# Altium PCB NASA.PcbDoc
Units mm, origin at the board's own origin, x right, y up, seen from the top; angles counter-clockwise.
Board outline 44.73 x 40.7 mm, 2 copper layers (Top Layer, Bottom Layer); 26 components, 16 nets, 123 pads, 54 vias.
Unrouted connection lines stored in the file: 2.
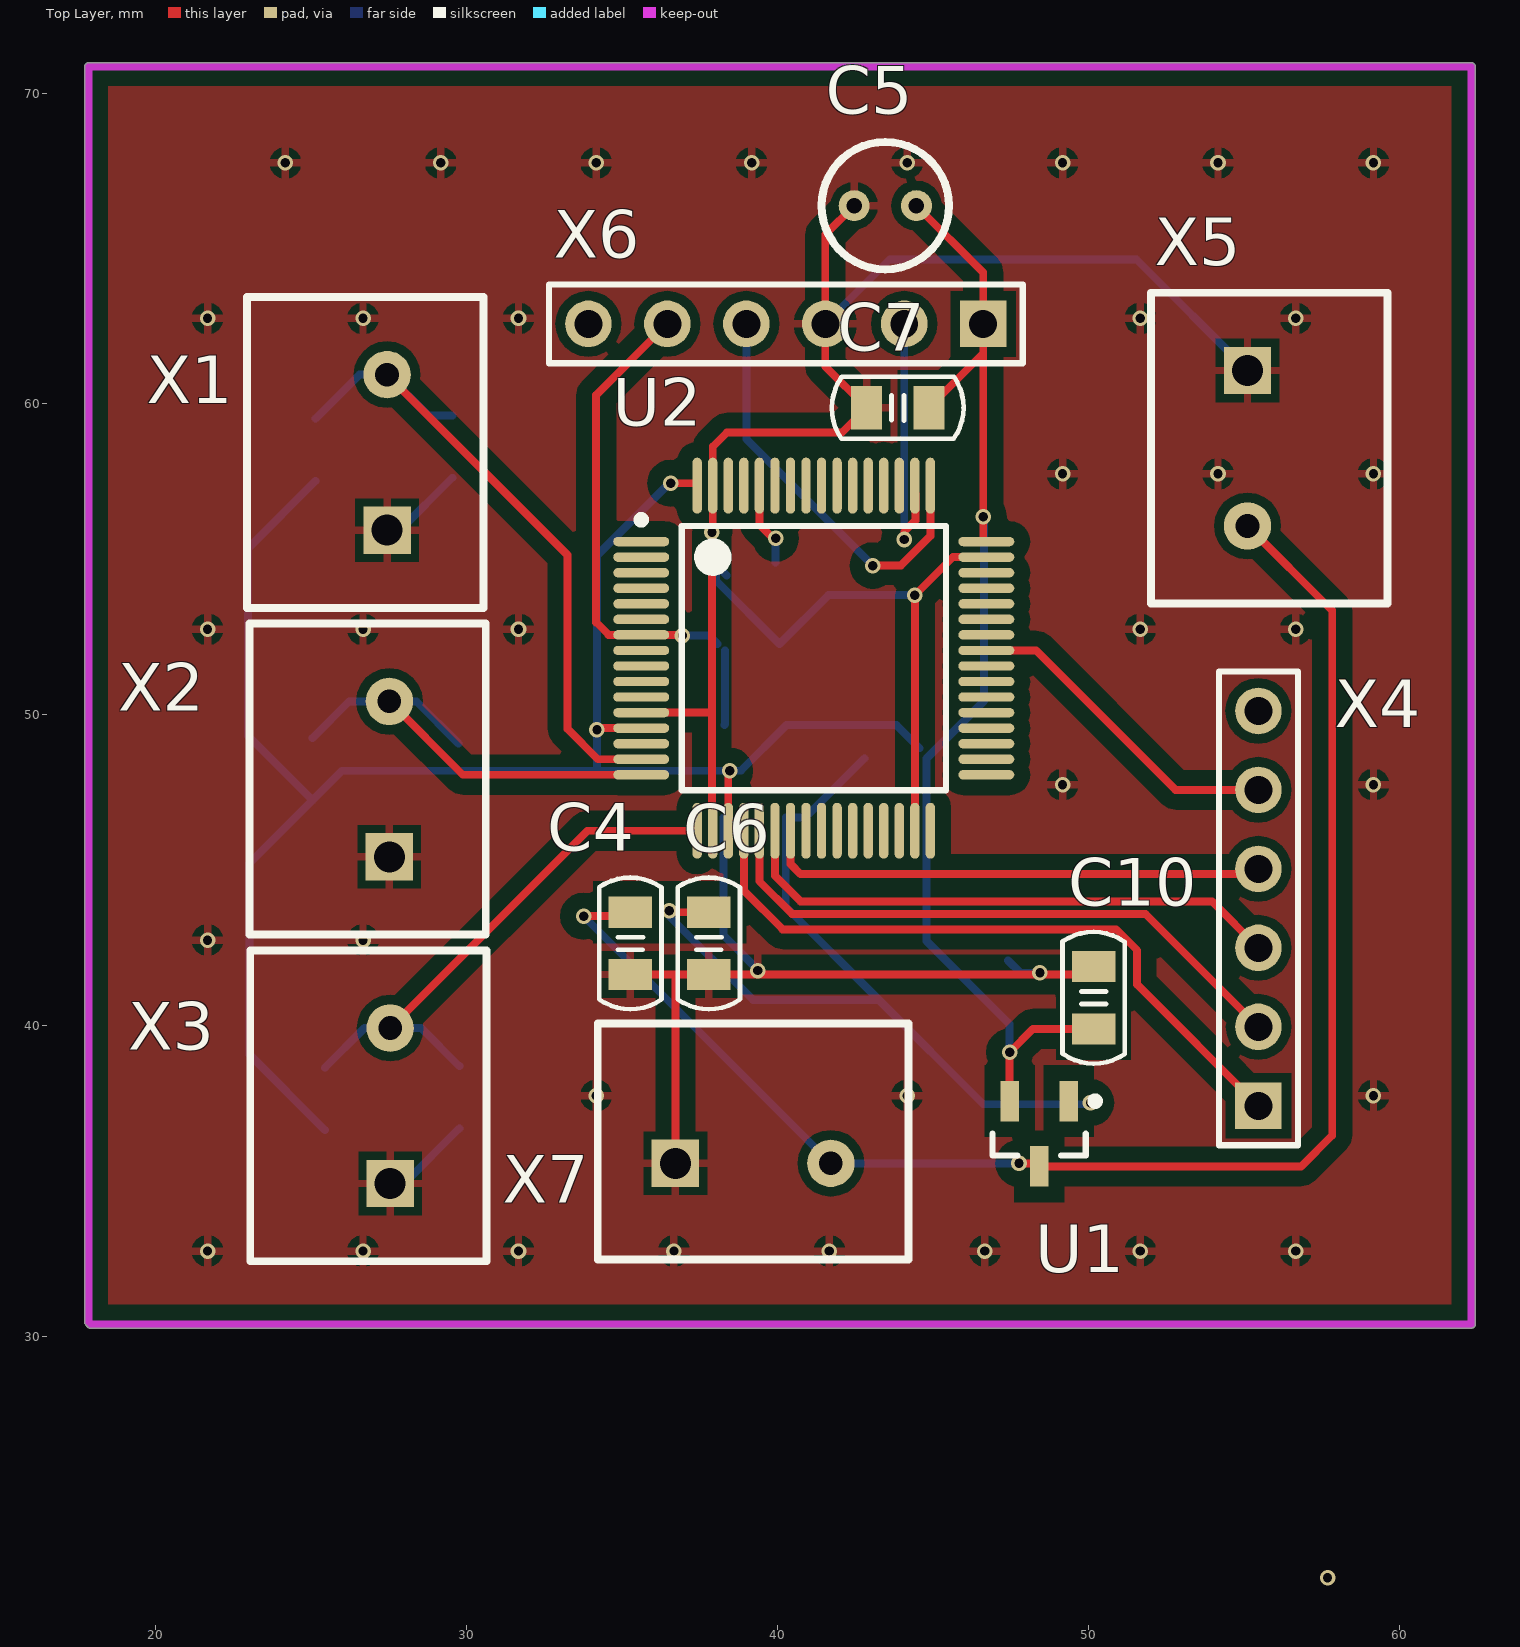
[diagram p0: Top Layer view]
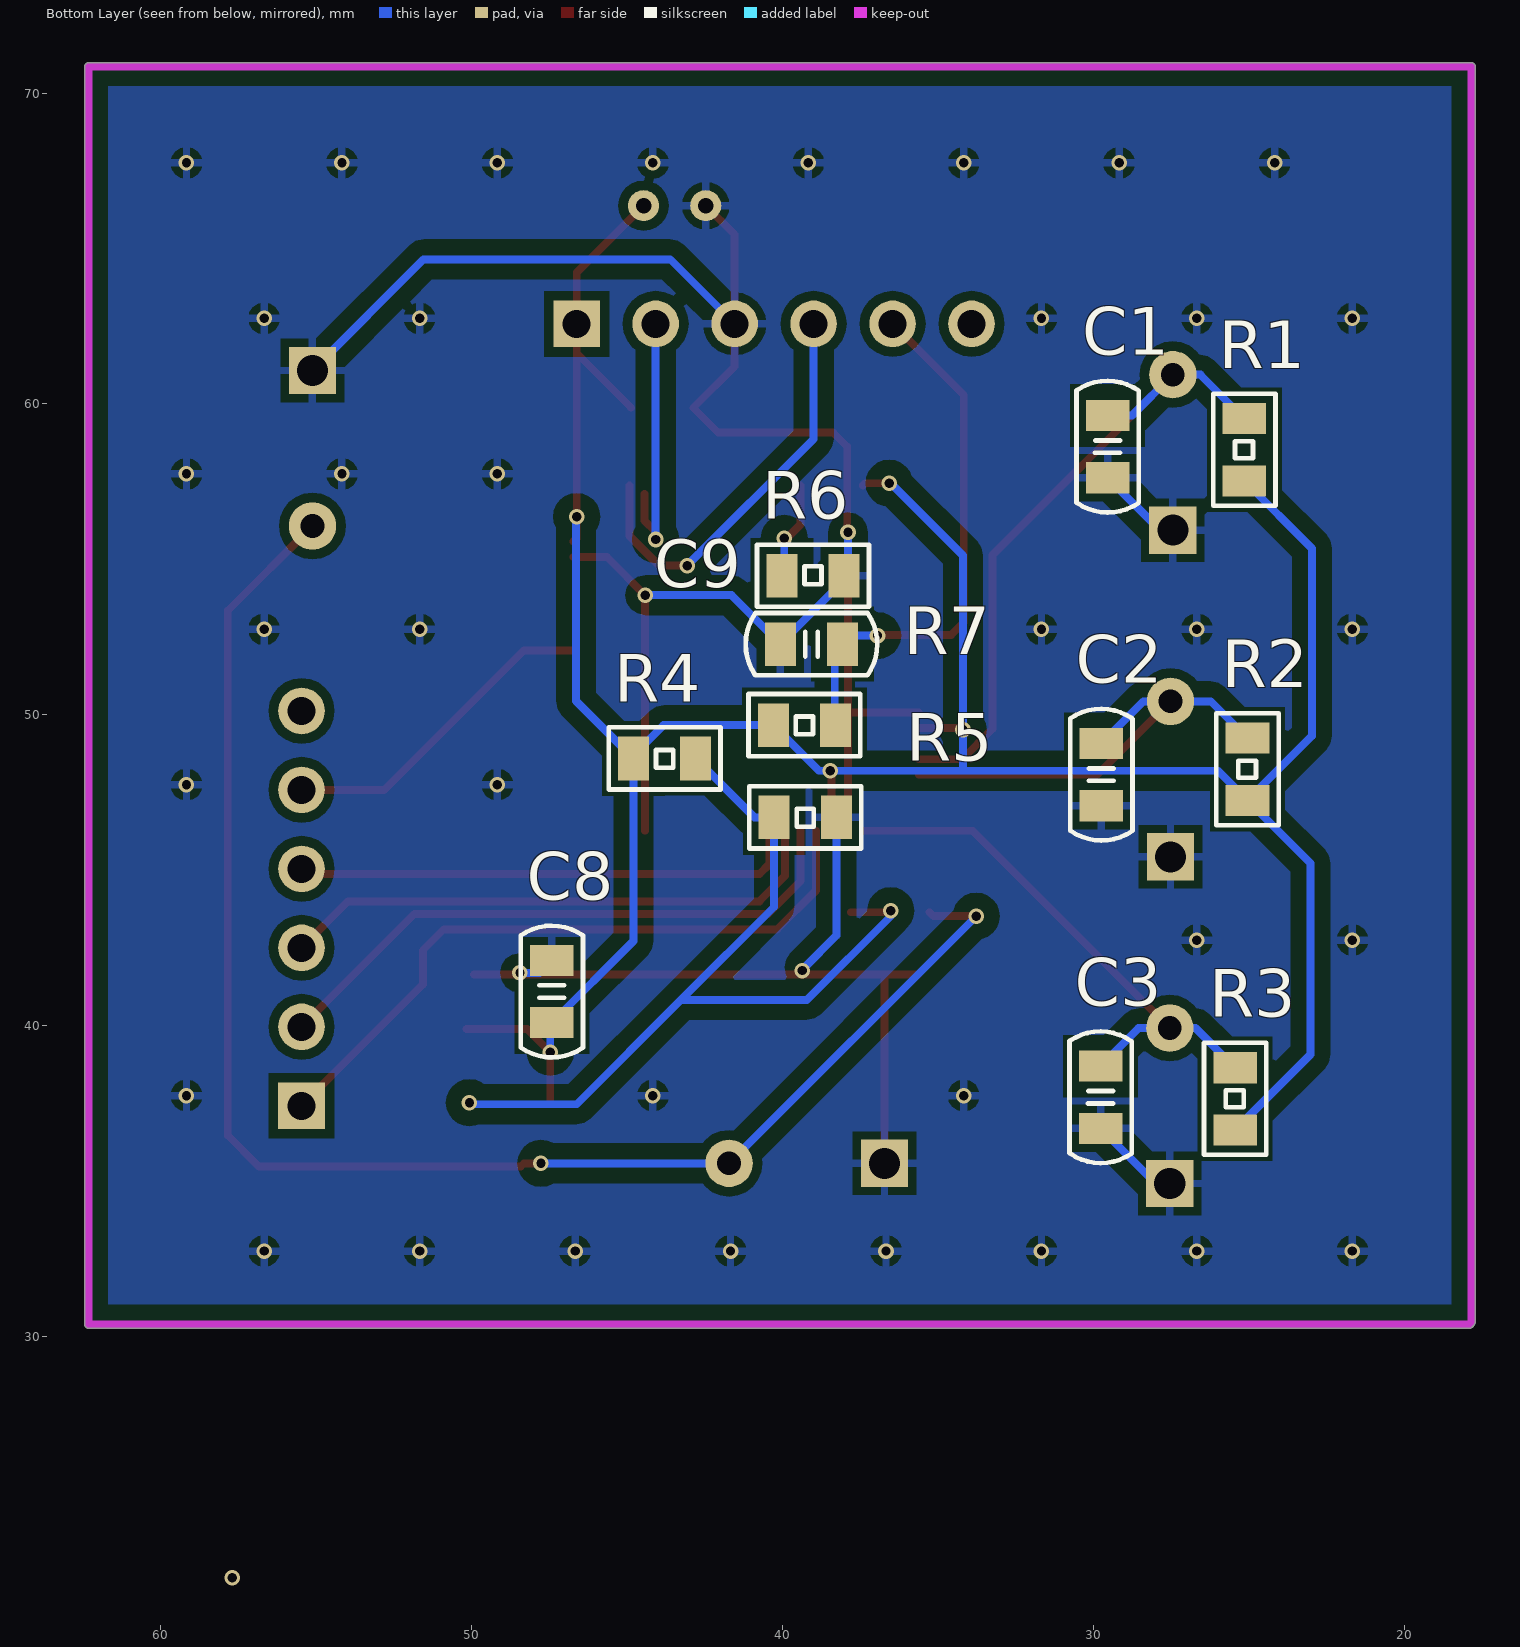
[diagram p1: Bottom Layer view, seen from below]

## Layer stack, top to bottom
Top Solder: solder mask 0.0102, Solder Resist, Dk 3.5
Top Layer: signal copper 0.0356
Dielectric 1: dielectric 0.32, FR-4, Dk 4.8
Bottom Layer: signal copper 0.0356
Bottom Solder: solder mask 0.0102, Solder Resist, Dk 3.5

## Board outline
17.776,30.371 cw(c17.85,30.475) 17.723,30.475 17.723,70.85 cw(c17.85,70.85) 17.85,70.977 62.325,70.977 cw(c62.325,70.85) 62.452,70.85 62.452,30.4 cw(c62.325,30.4) 62.325,30.273 17.9,30.273 cw(c17.9,30.4)

## Design rules (kind name [scope] priority, off if disabled: settings)
Clearance Clearance_1 [InNamedPolygon('K_L01_P002')] p1: gap=0.254
Clearance [All] p2: gap=0.5 except(0.1: Arc-Arc Arc-Track Arc-SMDPad Arc-THPad Arc-Fill Track-Track Track-SMDPad Track-THPad Track-Via Track-Fill SMDPad-SMDPad SMDPad-THPad SMDPad-Via SMDPad-Fill THPad-THPad THPad-Via THPad-Fill Via-Via Via-Fill Fill-Fill Fill-Poly Poly-Poly; 0.3: THPad-Poly)
PolygonConnect [All] p1: connectstyle=Relief reliefconductorwidth=0.254 reliefentries=4 polygonreliefangle="90 Angle" airgapwidth=0.254
RoutingVias [All] p1: holewidth=0.711 width=1.27 viastyle="Through Hole" minholewidth=0.711 minwidth=1.27 maxholewidth=0.711 maxwidth=1.27
SolderMaskExpansion [All] p1: expansion=0.102
Width [All] p1: maxlimit=2 minlimit=0.254 preferedwidth=0.254 minimp=50.000000 maximp=50.000000 favimp=50.000000
30 further rules are at their usual default settings.

## Components (designator, comment, footprint, x,y, rotation, side; value= is the part's Value field where it differs from the comment)
C1 "0.1 uF" "CAPACITOR 0805" 29.55,59.625 r270 bottom
C2 "0.1 uF" "CAPACITOR 0805" 29.75,49.075 r270 bottom
C3 "0.1 uF" "CAPACITOR 0805" 29.775,38.7 r270 bottom
C4 "10 uF" "CAPACITOR 0805" 35.275,41.649 r90 top
C5 "100 uF" D4.15 43.475,66.377 r180 top
C6 "10 nF" "CAPACITOR 0805" 37.8,41.649 r90 top
C7 "10 nF" "CAPACITOR 0805" 42.875,59.876 r0 top
C8 "22 uF" "CAPACITOR 0805" 47.425,42.1 r270 bottom
C9 "0.1 uF" "CAPACITOR 0805" 40.075,52.275 r180 bottom
C10 "0,1 uF" "CAPACITOR 0805" 50.175,39.9 r90 top
R1 "1 k" "Resistor 0805" 25.15,57.525 r90 bottom
R2 "1 k" "Resistor 0805" 25.05,47.25 r90 bottom
R3 "1 k" "Resistor 0805" 25.45,36.65 r90 bottom
R4 "442Om" "Resistor 0805" 42.8,48.596 r0 bottom
R5 "10K" "Resistor 0805" 38.275,46.7 r0 bottom
R6 "100 K" "Resistor 0805" 40.025,54.475 r180 bottom
R7 "10 K" "Resistor 0805" 38.3,49.671 r0 bottom
U1 "LM1117DTX-1.8" MF03A_N 48.425,36.525 r270 top
U2 "STM32L100R8T6" STM-LQFP64_N 41.175,51.822 r0 top
X1 "" DG301-5.0-02P 30.55,53.442 r90 top
X2 "" DG301-5.0-02P 30.625,42.933 r90 top
X3 "" DG301-5.0-02P 30.65,32.425 r90 top
X4 "" PLS-6-3D 55.475,37.425 r90 top
X5 "" DG301-5.0-02P 52.025,63.575 r270 top
X6 "ZL201-06G" PLS-6-3D 46.625,62.575 r180 top
X7 "DG301-5.0-03P" DG301-5.0-02P 34.225,32.475 r0 top

## Footprints (in the part's own frame and the unit in brackets; to place one, negate y for a bottom-side part, rotate by r counter-clockwise, add the part's x,y. Pads: shape width x height; smd on the part's side, far side on the other; paste and mask are expansions set on the pad)
"CAPACITOR 0805" [mm]
  rect 1x1.4 smd: 1(0,0) 2(2,0)
  silkscreen extent -1.12,-1 3.12,1, body extent 0.01,-0.6 2.01,0.6, height 1.26
D4.15 [mm]
  round 1 hole 0.5: 1(-1,0) 2(1,0)
  silkscreen extent -2.05,-2.05 2.05,2.05
DG301-5.0-02P [mm]
  rect 1.524x1.524 hole 1: 1(2.5,3.1)
  round 1.524 hole 0.762: 2(7.5,3.1)
  silkscreen extent 0,0 10,7.6
MF03A_N [mm] "SOT23, 3-Leads, Body 2.9x1.3mm, Pitch 0.95mm, Lead Span 2.4mm, IPC Medium Density"
  rect 1.3x0.6 smd: 1(-1.05,0.95) 2(-1.05,-0.95) 3(1.05,0)
  silkscreen extent -1.17,-1.5 0.7,1.93, body extent -0.7,-1.52 0.7,1.52, height 1.12
PLS-6-3D [mm] "Connector; Header; 6 Position"
  rect 1.5x1.5 hole 0.9: 1(0,0)
  round 1.5 hole 0.9: 2(2.54,0) 3(5.08,0) 4(7.62,0) 5(10.16,0) 6(12.7,0)
  silkscreen extent -1.27,-1.27 13.97,1.27, body extent -1.27,-1.27 13.97,1.27, height 8.44
"Resistor 0805" [mm]
  rect 1x1.4 smd: 1(0,0) 2(2,0)
  silkscreen extent -0.8,-1 2.8,1, body extent -0.03,-0.65 2.02,0.65, height 0.41
STM-LQFP64_N [mm] "Thin QFP, 64-Leads, Body 10x10mm, Pitch 0.5mm, IPC Medium Density"
  oval 1.8x0.3 smd: 1(-5.55,3.75) 2(-5.55,3.25) 3(-5.55,2.75) 4(-5.55,2.25) 5(-5.55,1.75) 6(-5.55,1.25) 7(-5.55,0.75) 8(-5.55,0.25) 9(-5.55,-0.25) 10(-5.55,-0.75) 11(-5.55,-1.25) 12(-5.55,-1.75) 13(-5.55,-2.25) 14(-5.55,-2.75) 15(-5.55,-3.25) 16(-5.55,-3.75) 33(5.55,-3.75) 34(5.55,-3.25) 35(5.55,-2.75) 36(5.55,-2.25) 37(5.55,-1.75) 38(5.55,-1.25) 39(5.55,-0.75) 40(5.55,-0.25) 41(5.55,0.25) 42(5.55,0.75) 43(5.55,1.25) 44(5.55,1.75) 45(5.55,2.25) 46(5.55,2.75) 47(5.55,3.25) 48(5.55,3.75)
  oval 0.3x1.8 smd: 17(-3.75,-5.55) 18(-3.25,-5.55) 19(-2.75,-5.55) 20(-2.25,-5.55) 21(-1.75,-5.55) 22(-1.25,-5.55) 23(-0.75,-5.55) 24(-0.25,-5.55) 25(0.25,-5.55) 26(0.75,-5.55) 27(1.25,-5.55) 28(1.75,-5.55) 29(2.25,-5.55) 30(2.75,-5.55) 31(3.25,-5.55) 32(3.75,-5.55) 49(3.75,5.55) 50(3.25,5.55) 51(2.75,5.55) 52(2.25,5.55) 53(1.75,5.55) 54(1.25,5.55) 55(0.75,5.55) 56(0.25,5.55) 57(-0.25,5.55) 58(-0.75,5.55) 59(-1.25,5.55) 60(-1.75,5.55) 61(-2.25,5.55) 62(-2.75,5.55) 63(-3.25,5.55) 64(-3.75,5.55)
  silkscreen extent -5.67,-4.25 4.25,4.57, body extent -5,-5 5,5, height 1.6

## Part data
C1 C2 C3 C4 C6 C7 C8 C9 C10: library part Capasitor
C5: library part C_E
R1 R2 R3 R4 R5 R6 R7: library part Resistor
U1: "800mA Low-Dropout Linear Regulator, 3-pin TO-252"
U2: "ARM Cortex-M3 32-bit MCU, 64 KB Flash, 8 KB Internal RAM, 51 I/Os, 64-pin LQFP, -40 to 85 degC, Tray"
X1 X2 X3 X5 X7: library part DG301-5.0-02P-12-00A
X4 X6: library part PLS-6, "Header, 6-Pin"

## Via types
v1: diameter 0.5, hole 0.3, Top Layer to Bottom Layer, 54 vias

## Nets (pads, with @x,y where several pads share a name; then routed paths per layer and width w, separated by ;. In a path a pad name is that pad's centre, name@x,y a point inside that pad or via, vN(x,y) a via of type N, cw(c..) or ccw(c..) an arc to the next point about the centre after c; other vN are vias at no path point)
"3.3 V": C4.2 U1.3 X5.2 X7.2 | length 49.8
  Top Layer w0.254: v1(33.775,43.525) 35.151,43.525 C4.2 ; v1(47.775,35.575) U1.3@48.325,35.575 ; U1.3 56.85,35.475 57.85,36.475 57.85,53.35 X5.2
  Bottom Layer w0.254: v1(33.775,43.525) X7.2 47.6,35.575 v1@47.625,35.6
ADC1: C1.1 R1.2 U2.15 X1.2 | length 22.1
  Top Layer w0.254: X1.2 33.25,55.142 33.25,49.55 34.228,48.572 U2.15
  Bottom Layer w0.254: R1.2 26.567,60.942 X1.2 28.767,59.625 C1.1
ADC2: C2.1 R2.2 U2.16 X2.2 | length 14.8
  Top Layer w0.254: X2.2 29.886,48.072 U2.16
  Bottom Layer w0.254: R2.2 26.233,50.433 X2.2 28.392,50.433 C2.1
ADC3: C3.1 R3.2 U2.17 X3.2 | length 17.9
  Top Layer w0.254: X3.2 33.897,46.272 U2.17
  Bottom Layer w0.254: R3.2 26.725,39.925 X3.2 28.55,39.925 C3.1
GND: C1.2 C2.2 C3.2 C4.1 C5.2 C6.1 C7.1 C8.1 C9.1 C10.2 R5.1 R6.2 U2.12 U2.18 U2.31 U2.47 U2.63 X1.1 X2.1 X3.1 X5.1 X6.3 X7.1 | length 96.9
  Top Layer w0.254: U2.12 37.9,50.072 37.9,49.25 ; C4.1@35.65,41.649 36.725,41.649 ; X7.1 36.725,41.649 ; v1(37.9,55.875) 37.9,49.25 ; U2.18 37.9,46.297 37.9,49.25 ; v1@37.925,55.85 U2.63 37.925,58.625 38.375,59.075 42.074,59.075 C7.1 41.545,61.206 X6.3 41.545,65.447 C5.2 ; U2.31 v1(44.425,53.85) 45.647,55.072 U2.47 ; C10.2@49.924,41.649 C6.1 36.725,41.649
  Bottom Layer w0.254: X1.1 27.867,55.942 C1.2 ; X3.1 28,34.925 C3.2 ; v1(37.9,55.875) 37.9,54.954 R6.2@38.375,54.479 ; R6.2 38.025,54.325 C9.1 41.65,53.85 v1(44.425,53.85) ; R5.1 38.275,42.9 v1@39.3,41.875 ; X6.3 43.62,64.65 51.55,64.65 X5.1 ; C8.1 47.825,41.7 v1(48.45,41.7)
  other v1: 21.677,32.752 26.677,32.752 31.677,32.752 36.677,32.752 41.677,32.752 46.677,32.752 51.677,32.752 56.677,32.752 34.177,37.752 44.177,37.752 59.177,37.752 39.375,41.775 21.677,42.752 26.677,42.752 49.177,47.752 59.177,47.752 21.677,52.752 26.677,52.752 31.677,52.752 51.677,52.752 56.677,52.752 49.177,57.752 54.177,57.752 59.177,57.752 21.677,62.752 26.677,62.752 31.677,62.752 51.677,62.752 56.677,62.752 24.177,67.752 29.177,67.752 34.177,67.752 39.177,67.752 44.177,67.752 49.177,67.752 54.177,67.752 59.177,67.752
JTCK: U2.50 X6.2 | length 8.5
  Top Layer w0.254: v1(44.085,55.64) 44.085,55.885 44.45,56.25 U2.50@44.45,57.101
  Bottom Layer w0.254: v1(44.085,55.64) X6.2
JTMS: U2.49 X6.4 | length 13.3
  Top Layer w0.254: v1(43.075,54.8) 43.975,54.8 44.925,55.75 U2.49
  Bottom Layer w0.254: X6.4 39.005,58.87 v1(43.075,54.8)
NetC6_2: C6.2 R4.1 R5.2 U1.1 | length 27.9
  Top Layer w0.254: v1(36.525,43.7) 36.576,43.649 C6.2
  Bottom Layer w0.254: v1(36.525,43.7) 36.525,43.525 39.225,40.825 43.275,40.825 ; R4.1 40.904,46.7 R5.2 40.275,43.825 43.275,40.825 ; v1@50.025,37.475 46.625,37.475 43.275,40.825
  other v1: 50.075,37.525
NetR6_1: R6.1 U2.60 | length 2.7
  Top Layer w0.254: U2.60 39.425,56.125 39.875,55.675 v1(39.95,55.675)
  Bottom Layer w0.254: R6.1@39.95,54.904 v1(39.95,55.675)
RES: U2.41 X4.5 | length 10.6
  Top Layer w0.254: U2.41 48.328,52.072 52.815,47.585 X4.5
RESET: C9.2 R7.1 U2.7 X6.5 | length 17.2
  Top Layer w0.254: X6.5 34.175,60.285 34.175,52.975 34.578,52.572 U2.7 v1@37.022,52.572
  Bottom Layer w0.254: v1(36.95,52.55) 37.8,52.55 C9.2 ; R7.1 38.325,49.696 C9.2@38.325,52.075
SPI_MISO: U2.22 X4.3 | length 18
  Top Layer w0.254: U2.22 39.925,44.825 40.75,44 53.98,44 X4.3
SPI_MOSI: U2.23 X4.4 | length 16.3
  Top Layer w0.254: U2.23 40.425,45.2 40.75,44.875 55.305,44.875 X4.4
SPI_NSS: U2.20 X4.1 | length 22
  Top Layer w0.254: U2.20 38.925,44.35 40.175,43.1 50.9,43.1 51.575,42.425 51.575,41.325 X4.1
SPI_SCK: U2.21 X4.2 | length 19.6
  Top Layer w0.254: U2.21 39.425,44.65 40.475,43.6 51.84,43.6 X4.2
VCC: C5.1 C7.2 C8.2 C10.1 R1.1 R2.1 R3.1 R4.2 R7.2 U1.2 U2.13 U2.19 U2.32 U2.48 U2.64 X6.1 | length 97.5
  Top Layer w0.254: v1@34.247,49.572 U2.13 ; v1(36.575,57.45) 37.347,57.45 U2.64 ; U2.19 v1@38.425,48.225 ; C5.1 46.625,64.227 X6.1 46.625,61.626 ; C7.2 46.625,61.626 ; U2.48 46.625,55.672 46.625,61.626 ; U1.2 v1(47.475,39.15) 48.225,39.9 C10.1
  Bottom Layer w0.254: R1.1 22.975,55.35 22.975,49.325 R2.1 ; R3.1 23.025,39.075 23.025,45.225 R2.1 ; 34.2,48.2 v1(34.2,49.525) 34.2,55.125 v1@36.55,57.475 ; R4.2@44.575,48.925 43.829,49.671 R7.2 38.829,48.2 26,48.2 R2.1 ; v1@46.625,56.275 46.65,56.25 46.65,50.446 R4.2 44.8,42.725 C8.2 ; v1(47.475,39.15) C8.2@47.475,40.05
  other v1: 38.475,48.2 46.625,56.375
pads on no net: U2.1 U2.2 U2.3 U2.4 U2.5 U2.6 U2.8 U2.9 U2.10 U2.11 U2.14 U2.24 U2.25 U2.26 U2.27 U2.28 U2.29 U2.30 U2.33 U2.34 U2.35 U2.36 U2.37 U2.38 U2.39 U2.40 U2.42 U2.43 U2.44 U2.45 U2.46 U2.51 U2.52 U2.53 U2.54 U2.55 U2.56 U2.57 U2.58 U2.59 U2.61 U2.62 X4.6 X6.6
copper on no net:
  other v1: 57.7,22.25

## Polygon pours and split planes (outlines as drawn)
GND on Top Layer "Top Layer-No Net" (solid, pour order 10): 17.85,70.85 17.9,70.9 62.05,70.9 62.05,30.675 62.325,30.4 62.25,30.475 17.85,30.475
GND on Bottom Layer "Top Layer-No Net" (solid, pour order 12): 17.85,70.85 61.95,70.85 62.2,70.6 62.125,70.525 62.125,30.525 18.175,30.525 18.025,30.675

## Keep-outs
Keep-Out Layer:
  lines w0.254: 17.85,30.475 17.85,68.45 17.85,70.85 62.325,70.85 62.325,30.4 17.9,30.4